# Altium PCB PCB1.PcbDoc
Units mm, origin at the board's own origin, x right, y up, seen from the top; angles counter-clockwise.
Board outline 18.46 x 50.1 mm, 2 copper layers (Component Side, Solder Side), stack 0.266 mm thick; 21 components, 22 nets, 87 pads, 33 vias.
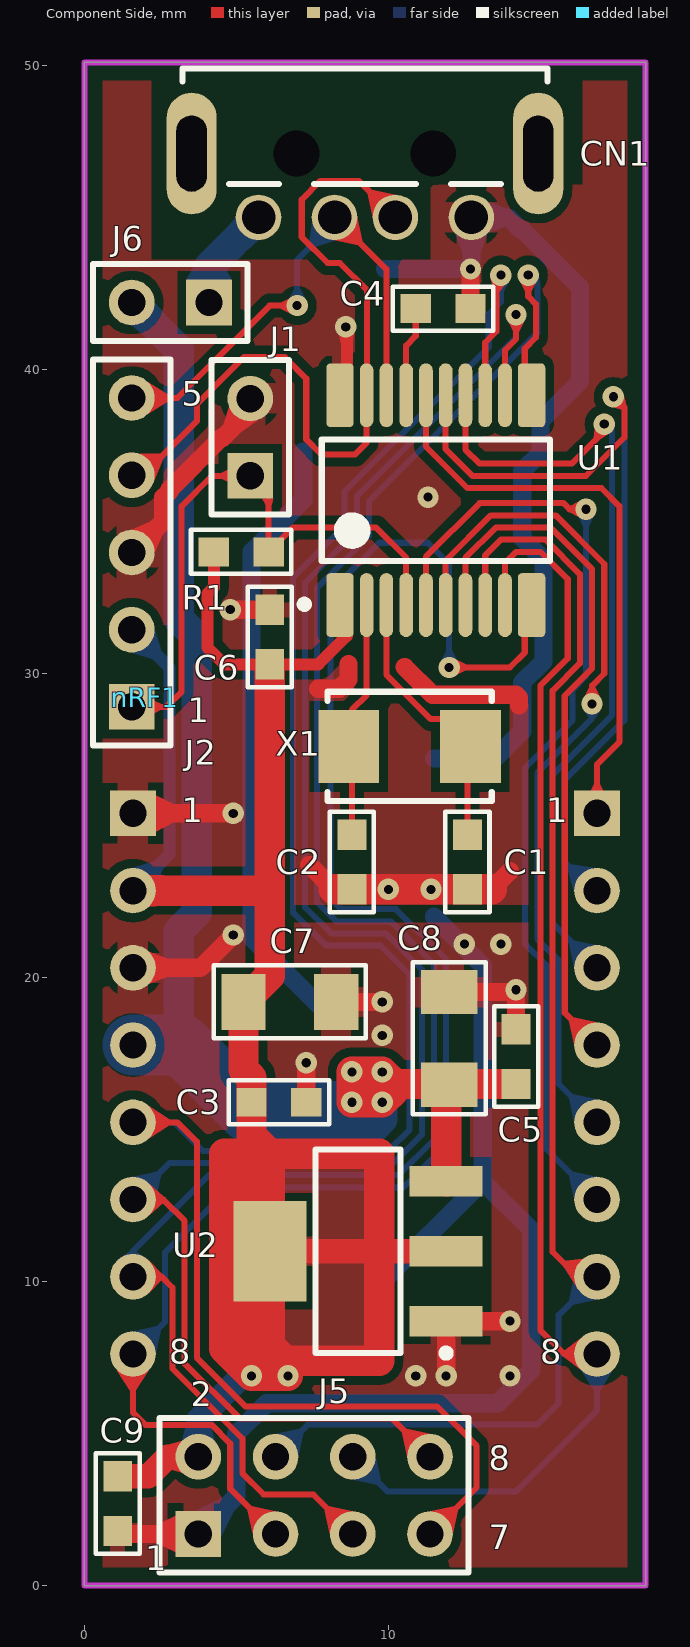
[diagram p0: Component Side view]
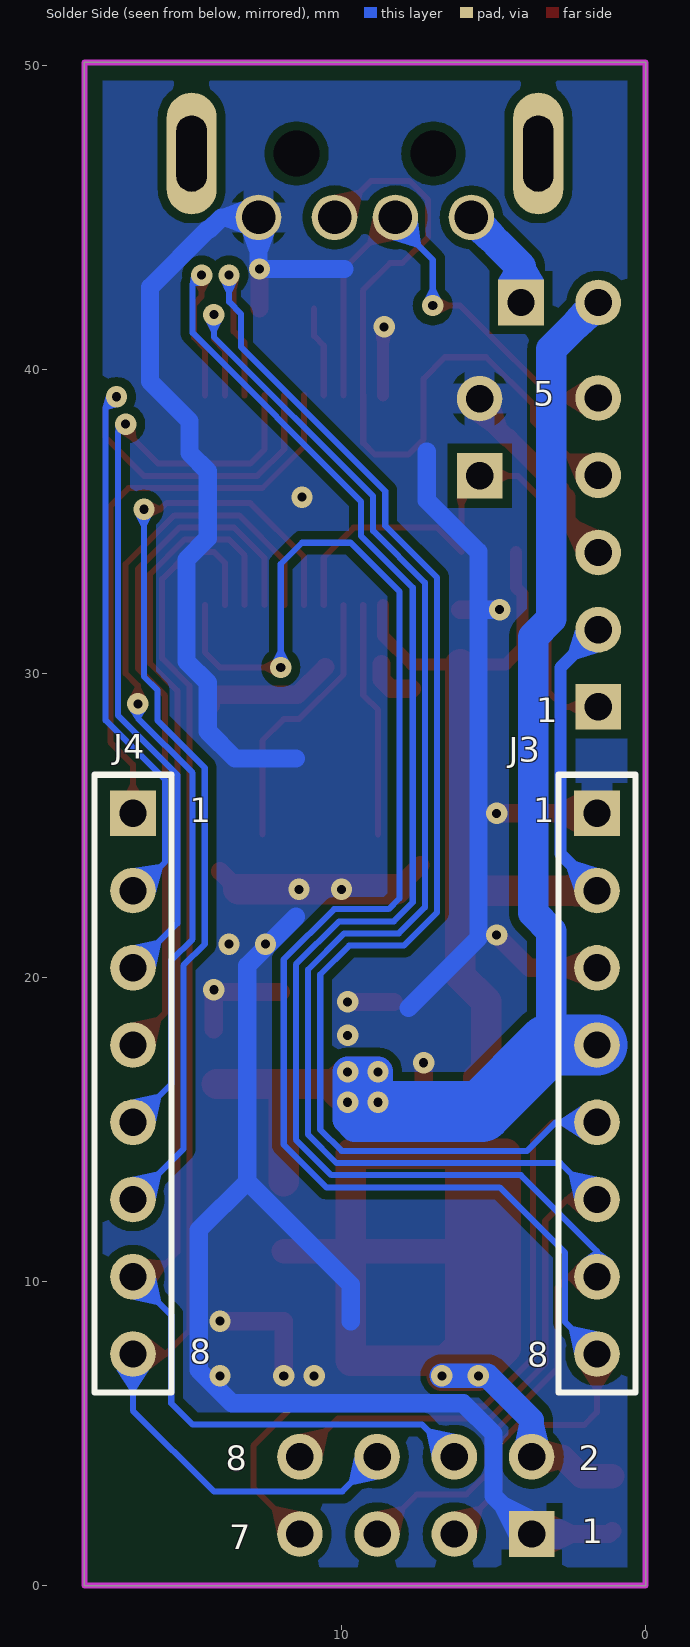
[diagram p1: Solder Side view, seen from below]

## Layer stack, top to bottom
Top Solder: solder mask 0.0102, Solder Resist, Dk 3.5
Component Side: signal copper 0.03
Dielectric 1: core 0.2, FR-4, Dk 4.58
Solder Side: signal copper 0.0356
Bottom Solder: solder mask 0.0102, Solder Resist, Dk 3.5

## Board outline
0,0 18.46,0 18.46,50.1 0,50.1

## Design rules (kind name [scope] priority, off if disabled: settings)
Clearance ClearanceKeepout [All vs OnLayer('Keep-Out Layer')] p1: gap=0.5 ignorepadtopadclearanceinfootprint=FALSE except(0: Arc-Hole Track-Hole SMDPad-Hole THPad-Hole Via-Hole Fill-Hole Poly-Hole Region-Hole Text-Hole)
Clearance ClearanceNPTH [HasPad('Free-NPTH')] p2: gap=1 ignorepadtopadclearanceinfootprint=FALSE except(0: Arc-Hole Track-Hole SMDPad-Hole THPad-Hole Via-Hole Fill-Hole Poly-Hole Region-Hole Text-Hole)
Clearance [All] p3: gap=0.2 ignorepadtopadclearanceinfootprint=FALSE except(0: Arc-Hole Track-Hole SMDPad-Hole THPad-Hole Via-Hole Fill-Hole Poly-Hole Region-Hole Text-Hole; 0.3: Arc-Poly Track-Poly SMDPad-Poly THPad-Poly Via-Poly Fill-Poly Poly-Poly)
ComponentClearance [All] p1 off: gap=0.254 collisioncheckmode=3 verticalgap=0.254 showdistances=FALSE
DiffPairsRouting [All] p1: maxlimit=0.4 minlimit=0.2 mostfreqgap=0.4 toplayer_minwidth=0.2 toplayer_maxwidth=0.3 toplayer_prefwidth=0.3 bottomlayer_minwidth=0.2 bottomlayer_maxwidth=0.3 bottomlayer_prefwidth=0.3 maxuncoupledlength=12.7
Height [All] p1 off: minheight=0 maxheight=25.4 prefheight=12.7
HoleSize [All] p1: absolutevalues=TRUE maxlimit=10 minlimit=0.3 maxpercent=80.000 minpercent=20.000
MinimumSolderMaskSliver [All] p1: minsoldermaskwidth=0.1
PlaneClearance [All] p1: clearance=0.5
PlaneClearance PlaneClearanceNPTH [HasPad('Free-NPTH')] p2: clearance=1.5
PlaneConnect PlaneConnectVia [IsVia] p1: planeconnectstyle=Direct reliefexpansion=0.508 reliefentries=4 reliefconductorwidth=0.254 reliefairgap=0.254
PlaneConnect PlaneConnectHole0_1 [HoleDiameter Between 0.1 and 0.3] p2: planeconnectstyle=Direct reliefexpansion=0.508 reliefentries=4 reliefconductorwidth=0.254 reliefairgap=0.254
PlaneConnect PlaneConnectHole0_3 [HoleDiameter Between 0.3 and 0.5] p3: planeconnectstyle=Relief reliefexpansion=0.508 reliefentries=4 reliefconductorwidth=0.4 reliefairgap=0.254
PlaneConnect PlaneConnectHole0_5 [HoleDiameter Between 0.5 and 0.8] p4: planeconnectstyle=Relief reliefexpansion=0.508 reliefentries=4 reliefconductorwidth=0.6 reliefairgap=0.254
PlaneConnect PlaneConnectHole0_8 [HoleDiameter Between 0.8 and 1.0] p5: planeconnectstyle=Relief reliefexpansion=0.508 reliefentries=4 reliefconductorwidth=0.8 reliefairgap=0.254
PlaneConnect PlaneConnectHole1_0 [HoleDiameter > 1.0] p6: planeconnectstyle=Relief reliefexpansion=0.508 reliefentries=4 reliefconductorwidth=1 reliefairgap=0.254
PlaneConnect [All] p7: planeconnectstyle=Relief reliefexpansion=0.508 reliefentries=4 reliefconductorwidth=0.254 reliefairgap=0.254
PolygonConnect PolygonConnect_BottomPad [IsPad And (PadXSize_BottomLayer * PadYSize_BottomLayer > 2)] p1: connectstyle=Relief reliefconductorwidth=1 reliefentries=4 polygonreliefangle="90 Angle" airgapwidth=0.254
PolygonConnect PolygonConnect_TopPad [IsPad And (PadXSize_TopLayer * PadYSize_TopLayer > 2)] p2: connectstyle=Relief reliefconductorwidth=1 reliefentries=4 polygonreliefangle="90 Angle" airgapwidth=0.254
PolygonConnect PolygonConnectVia [All vs IsVia] p3: connectstyle=Direct reliefconductorwidth=0.254 reliefentries=4 polygonreliefangle="90 Angle" airgapwidth=0.254
PolygonConnect PolygonConnectHole0_1 [All vs HoleDiameter Between 0.1 and 0.3] p4: connectstyle=Relief reliefconductorwidth=0.254 reliefentries=4 polygonreliefangle="90 Angle" airgapwidth=0.254
PolygonConnect PolygonConnectHole0_3 [All vs HoleDiameter Between 0.3 and 0.5] p5: connectstyle=Relief reliefconductorwidth=0.4 reliefentries=4 polygonreliefangle="90 Angle" airgapwidth=0.254
PolygonConnect PolygonConnectHole0_5 [All vs HoleDiameter Between 0.5 and 0.8] p6: connectstyle=Relief reliefconductorwidth=0.6 reliefentries=4 polygonreliefangle="90 Angle" airgapwidth=0.254
PolygonConnect PolygonConnectHole0_8 [All vs HoleDiameter Between 0.8 and 1.0] p7: connectstyle=Relief reliefconductorwidth=0.8 reliefentries=4 polygonreliefangle="90 Angle" airgapwidth=0.254
PolygonConnect PolygonConnectHole1_0 [HoleDiameter > 1.0] p8: connectstyle=Relief reliefconductorwidth=1 reliefentries=4 polygonreliefangle="90 Angle" airgapwidth=0.254
PolygonConnect PolygonConnect_Default [All] p9: connectstyle=Relief reliefconductorwidth=0.5 reliefentries=4 polygonreliefangle="90 Angle" airgapwidth=0.254
RoutingVias [All] p1: holewidth=0.3 width=0.6 viastyle="Through Hole" minholewidth=0.3 minwidth=0.7 maxholewidth=0.5 maxwidth=1
SilkToSilkClearance [All] p1: silktosilkclearance=0.05
SilkToSolderMaskClearance [IsPad] p1: minsilkscreentomaskgap=0.1 clearancetoexposedcopper=TRUE
SolderMaskExpansion SolderMaskExpansionVia [IsVia] p1: expansion=-0.18 istentingtop=FALSE
SolderMaskExpansion [All] p2: expansion=0.1 istentingtop=FALSE
Width WidthPWR [InNetClass('PWR')] p1: maxlimit=2 minlimit=0.3 preferedwidth=0.5 minimp=50.000000 maximp=50.000000 favimp=50.000000
Width Width_all [All] p2: maxlimit=2 minlimit=0.2 preferedwidth=0.2 minimp=50.000000 maximp=50.000000 favimp=50.000000
21 further rules are at their usual default settings.

## Classes and differential pairs
differential pair PIC_D: +PIC_D_P -PIC_D_N

## Components (designator, comment, footprint, x,y, rotation, side; value= is the part's Value field where it differs from the comment)
C1 "CC0603KRX7R9BB223" CHIP1608 12.6,23.8 r90 top
C2 "CC0603KRX7R9BB223" CHIP1608 8.8,23.8 r90 top
C3 "CC0603KRX7R9BB104" CHIP1608 6.4,15.9 r180 top
C4 "CC0603KRX7R8BB224" CHIP1608 11.8,42 r180 top
C5 "CC0603KRX7R9BB104" CHIP1608 14.2,17.4 r270 top
C6 "CC0603KRX7R9BB104" CHIP1608 6.1,31.2 r270 top
C7 "TAJA226K010RNJ" CHIP3216 6.76,19.2 r180 top
C8 "CC1206KKX5R8BB106" CHIP3216 12,18 r270 top
C9 "CC0603KRX7R8BB105" CHIP1608 1.1,2.7 r90 top
CN1 "1470695-3" UP2-AH-1-TH 9.23,45.8 r180 top
J1 "PHSS02G10" HDR1X2 5.46,36.5 r90 top
J2 "PHSS05G10" HDR1X5 1.56,28.9 r90 top
J3 "Header 8" HDR1X8 1.6,25.4 r90 bottom
J4 "Header 8" HDR1X8 16.86,25.4 r90 bottom
J5 "Header 4X2" HDR2X4 3.75,1.7 r0 top
J6 "PHSS02G10" HDR1X2 4.1,42.2 r180 top
nRF1 "nRF24L01[DNI]" nRF24L01 2,29.2 r270 top
R1 "RC0603JR-071KL" CHIP1608 5.16,34 r0 top
U1 "PIC18F14K50-I/SS" PIC18F14K50-SS 11.56,35.7 r90 top
U2 "LD1117AS33TR" SOT-223_N 9,11 r180 top
X1 "445C33C12M00000" 445C33C12M00000 10.7,27.6 r0 top

## Footprints (in the part's own frame and the unit in brackets; to place one, negate y for a bottom-side part, rotate by r counter-clockwise, add the part's x,y. Pads: shape width x height; smd on the part's side, far side on the other; paste and mask are expansions set on the pad)
445C33C12M00000 [mm]
  rect 2x2.4 smd mask+0.1: 1(-2,0) 2(2,0)
  silkscreen extent -2.7,-1.8 2.7,1.8, body extent -2.5,-1.6 2.5,1.6, height 4.2
CHIP1608 [mm] "Chip Resistor, 2-Leads, Body 1.60x0.80mm, IPC Low Density"
  rect 1x0.95 smd mask+0.1: 1(-0.9,0) 2(0.9,0)
  Component Side pour cut-out: -0.4,0.729 -0.4,-0.729 0.4,-0.729 0.4,0.729
  silkscreen extent -1.65,-0.72 1.65,0.72, body extent -0.8,-0.4 0.8,0.4, height 0.45
CHIP3216 [mm] "Chip Capacitor, 2-Leads, Body 3.20x1.60mm, IPC Low Density"
  rect 1.45x1.85 smd: 1(-1.525,0) 2(1.525,0)
  Component Side pour cut-out: -0.8,1.179 -0.8,-1.179 0.8,-1.179 0.8,1.179
  silkscreen extent -2.5,-1.2 2.5,1.2, body extent -1.6,-0.8 1.6,0.8, height 0.6
HDR1X2 [mm] "Connector; Header; 2 Position"
  rect 1.5x1.5 hole 0.9: 1(0,0)
  round 1.5 hole 0.9: 2(2.54,0)
  silkscreen extent -1.27,-1.27 3.81,1.27, body extent -1.29,-1.15 3.79,1.26, height 8.18
HDR1X5 [mm] "Connector; Header; 5 Position"
  rect 1.5x1.5 hole 0.9: 1(0,0)
  round 1.5 hole 0.9: 2(2.54,0) 3(5.08,0) 4(7.62,0) 5(10.16,0)
  silkscreen extent -1.27,-1.27 11.43,1.27, body extent -1.29,-1.15 11.41,1.26, height 8.18
HDR1X8 [mm] "Connector; Header; 8 Position"
  rect 1.5x1.5 hole 0.9: 1(0,0)
  round 1.5 hole 0.9: 2(-2.54,0) 3(-5.08,0) 4(-7.62,0) 5(-10.16,0) 6(-12.7,0) 7(-15.24,0) 8(-17.78,0)
  silkscreen extent -19.05,-1.27 1.27,1.27, body extent -19.07,-1.15 1.25,1.26, height 8.18
HDR2X4 [mm] "Connector; Header; 4x2 Position"
  rect 1.5x1.5 hole 0.9: 1(0,0)
  round 1.5 hole 0.9: 2(0,2.54) 3(2.54,0) 4(2.54,2.54) 5(5.08,0) 6(5.08,2.54) 7(7.62,0) 8(7.62,2.54)
  silkscreen extent -1.27,-1.27 8.89,3.81, body extent -1.25,-1.26 8.91,3.82, height 8.5
nRF24L01 [mm]
  body extent 0.03,-0.02 29.03,14.98, height 13.5
PIC18F14K50-SS [mm] "SOP, 20-Leads, Body 7.2x5.2mm, Pitch 0.65mm, IPC Medium Density"
  rrect30% 2.1x0.9 smd: 1(-3.45,3.15) 10(-3.45,-3.15) 11(3.45,-3.15) 20(3.45,3.15)
  oval 2.1x0.45 smd: 2(-3.45,2.275) 3(-3.45,1.625) 4(-3.45,0.975) 5(-3.45,0.325) 6(-3.45,-0.325) 7(-3.45,-0.975) 8(-3.45,-1.625) 9(-3.45,-2.275) 12(3.45,-2.275) 13(3.45,-1.625) 14(3.45,-0.975) 15(3.45,-0.325) 16(3.45,0.325) 17(3.45,0.975) 18(3.45,1.625) 19(3.45,2.275)
  silkscreen extent -3.55,-3.75 2,4.45, body extent -2.7,-3.75 2.7,3.75, height 2
SOT-223_N [mm] "SOT223, 4-Leads, Body 6.5x3.5mm, Pitch 2.3mm, Lead Span 7mm, IPC Medium Density"
  rect 2.4x1 smd: 1(-2.9,2.3) 2(-2.9,0) 3(-2.9,-2.3)
  rect 2.4x3.3 smd: 4(2.9,0)
  silkscreen extent -3.03,-3.35 1.4,3.47, body extent -1.85,-3.35 1.85,3.35, height 1.8
UP2-AH-1-TH [mm] "Connector; USB1.1, Type A, SM; 4 Position; Right Angle"
  round 1.5 hole 1.1: 1(3.5,0.8) 2(1,0.8) 3(-1,0.8) 4(-3.5,0.8)
  oval 1.65x4 hole 1 slot 2.5 at 90 deg: 5(-5.7,-1.3) 6(5.7,-1.3)
  round 1.2 hole 1.5 unplated: MH1(-2.25,-1.3) MH2(2.25,-1.3)
  silkscreen extent -6,-4.1 6,-0.3, body extent -6.3,-19.1 6.3,0.9, height 4.15

## Part data
C1 C2 C3 C4 C5 C6 C7 C8 C9: library part "Cap Semi", "Capacitor (Semiconductor SIM Model)"
CN1: "USB 1.1, Right Angle, SMT, A Type, Plug, 4 Position, Black"
J1 J6: library part "Header 2", "Header, 2-Pin"
J2: library part "Header 5", "Header, 5-Pin"
J3 J4: "Header, 8-Pin"
J5: "Header, 4-Pin, Dual row"
nRF1: library part nRF24L01
R1: library part Res3, "Resistor"
U1: library part PIC18F14K50, "MICROCHIPS"
U2: "1A, Low Drop Positive Voltage Regulator, 3.3V, 4-Pin SOT-223, Tape and Reel"
X1: library part ABLS-25.000MHZ-B2F-T, "MEC"

## Via types
v1: diameter 0.7, hole 0.3, Component Side to Solder Side, 33 vias

## Nets (pads, with @x,y where several pads share a name; then routed paths per layer and width w, separated by ;. In a path a pad name is that pad's centre, name@x,y a point inside that pad or via, vN(x,y) a via of type N, cw(c..) or ccw(c..) an arc to the next point about the centre after c; other vN are vias at no path point)
3_3V: C3.2 C6.2 C7.2 C9.2 J2.2 J3.2 J5.2 R1.1 U1.1 U2.2 U2.4 | length 92.6
  Component Side w0.4: R1.1 4.26,32.831 4.05,32.621 4.05,30.85 4.6,30.3 C6.2 7.695,30.3 8.635,31.24 U1.1@8.635,32.25
  Component Side w0.8: C9.2 2.1,3.6 2.74,4.24 J5.2 ; U2.4 9.7,11 U2.2
  Component Side w1: J3.2 6,22.86 ; 6.1,6.9 6.1,7.9 ; C6.2 6.1,20.065 C7.2 5.235,16.965 5.5,16.7 C3.2 5.5,14.8 6.1,14.2 ; v1(6.7,6.9) v1(5.5,6.9) 5.231,7.169 ; 5.231,7.169 4.6,7.8 4.6,14.2 5.231,14.2 ; 5.231,7.169 5.231,14.2 ; 5.231,14.2 6.1,14.2 ; 6.1,7.9 6.6,7.4 9.7,7.4 9.7,11 9.7,14.2 6.1,14.2 ; 6.1,7.9 U2.4 6.1,14.2
  Solder Side w0.4: J2.2 2.8,30.2 2.8,24.06 J3.2
  Solder Side w0.8: J5.2 3.75,5.45 5.2,6.9 v1(5.5,6.9) v1(6.7,6.9)
GND: C1.1 C2.1 C3.1 C4.1 C5.1 C6.1 C7.1 C8.1 C9.1 CN1.4 J1.2 J2.3 J3.1 J3.3 J5.1 U1.20 U2.1 | length 130
  Component Side w0.4: U1.20@8.635,39.15 v1@8.635,41.365
  Component Side w0.6: C9.1 1.2,1.7 J5.1 ; J2.3 2.6,35.02 2.6,35.792 2.81,36.002 2.81,36.057 4.503,37.75 4.55,37.75 5.46,38.66 J1.2 ; J3.3 3.82,20.32 v1(4.9,21.4) ; J3.1 v1(4.9,25.4) ; v1(4.8,32.1) C6.1 ; C3.1 v1(7.3,17.2) ; 7.4,23.7 8.2,22.9 ; 7.693,29.5 8.385,29.5 8.685,29.8 8.685,30.3 ; C7.1 v1(9.8,19.2) ; 10.535,30.214 11.449,29.3 14.2,29.3 14.3,29.2 14.3,28.95 ; v1(11.9,6.9) U2.1 v1(14,8.7) ; C8.1 v1@14.125,19.525 ; C4.1 v1(12.7,43.3) ; 13.4,22.9 14,23.5 ; C5.1 v1@14.2,19.45
  Component Side w1: 8.2,22.9 C2.1 v1(10,22.9) v1(11.4,22.9) C1.1 13.4,22.9
  Solder Side w0.6: J5.1 5,2.95 5,5 6,6 13.6,6 14.7,7.1 14.7,11.7 13.1,13.3 ; v1(4.8,32.1) 5.5,32.1 ; 7.2,37.3 7.2,35.7 5.5,34 5.5,32.1 ; 7.8,19 5.5,21.3 5.5,32.1 ; 9.7,8.7 9.7,9.9 13.1,13.3 ; 9.9,43.3 v1(12.7,43.3) ; 11.5,22 13.1,20.4 13.1,13.3 ; 11.5,27.2 13.5,27.2 14.4,28.1 14.4,29.7 15.1,30.4 15.1,33.749 14.4,34.449 14.4,36.651 15,37.251 15,38.3 16.3,39.6 16.3,42.7 14.4,44.6 14.351,44.6 13.951,45 CN1.4 ; CN1.4@12.7,45 CN1.4 ; v1@12.73,43.33 CN1.4
  other v1: 10.9,6.9 14,6.9 9.8,18.1 14.2,19.6 12.5,21.1 13.7,21.1 11.3,35.8 8.6,41.4
NetC1_2: C1.2 U1.3 X1.2 | length 8.9
  Component Side w0.2: U1.3 9.935,29.965 11.4,28.5 11.9,28.5 12.6,27.8 C1.2
NetC2_2: C2.2 U1.2 X1.1 | length 7.8
  Component Side w0.2: C2.2 8.8,28.8 9.285,29.285 U1.2
NetC4_2: C4.2 U1.17 | length 3
  Component Side w0.2: U1.17 10.585,40.785 10.9,41.1 C4.2
PIC_D_N: CN1.2 J2.5 U1.18 | length 16.7
  Component Side w0.2: J2.5 3.06,39.06 5.5,41.5 6.1,42.1 v1(7,42.1) ; CN1.2 9.935,43.295 U1.18
  Solder Side w0.2: v1(7,42.1) 7,43.6 8.23,44.83 CN1.2
PIC_D_P: CN1.3 J2.4 U1.19 | length 25.3
  Component Side w0.2: J2.4 1.92,36.52 3.7,38.3 3.7,38.851 5.249,40.4 6.6,40.4 7.3,39.7 7.3,37.7 7.8,37.2 8.9,37.2 9.285,37.585 U1.19 9.3,39.165 9.3,42.6 8.4,43.5 8,43.5 7.15,44.35 7.15,45.585 7.765,46.2 9.03,46.2 CN1.3
PIC_MCLR: J1.1 J2.1 R1.2 U1.4 | length 20.2
  Component Side w0.2: J2.1 2.7,28.9 3.2,29.4 3.2,35.5 4.2,36.5 J1.1 6.06,35.9 R1.2 6.86,34.8 9.6,34.8 10.585,33.815 U1.4
PIC_RB4: J3.5 J5.7 U1.13 | length 70.9
  Component Side w0.2: J3.5 3.06,15.24 3.7,14.6 3.7,7.5 5.3,5.9 11.6,5.9 12.9,4.6 12.9,3.23 J5.7 ; U1.13 13.185,40.885 13.55,41.25 13.55,42.95 v1(13.7,43.1)
  Solder Side w0.2: J3.5 2.96,15.24 3.9,14.3 10,14.3 10.7,15 10.7,20.1 9.75,21.05 7.953,21.05 6.859,22.144 6.859,33.156 8.562,34.859 8.562,35.994 13.3,40.731 13.3,41.819 13.7,42.219 v1(13.7,43.1)
PIC_RB5: J3.6 J5.8 U1.12 | length 61.7
  Component Side w0.2: J3.6 2.6,12.7 3.3,12 3.3,7.306 5.106,5.5 10.11,5.5 J5.8 ; U1.12 13.835,40.635 14.2,41 v1(14.2,41.8)
  Solder Side w0.2: J3.6 2.8,13.9 10.166,13.9 11.1,14.834 11.1,20.266 9.916,21.45 8.119,21.45 7.259,22.31 7.259,32.99 8.962,34.694 8.962,35.828 14.2,41.066 v1(14.2,41.8)
PIC_RB6: J3.7 J5.5 U1.11 | length 63.6
  Component Side w0.2: J3.7 2.54,10.16 2.9,9.8 2.9,7.141 5.2,4.841 5.2,3.7 5.9,3 7.53,3 J5.5 ; U1.11@14.485,39.15 14.485,40.685 14.85,41.05 14.85,42.15 14.6,42.4 v1(14.6,43.1)
  Solder Side w0.2: J3.7 1.6,11 4.1,13.5 10.331,13.5 11.5,14.669 11.5,20.431 10.081,21.85 8.284,21.85 7.659,22.476 7.659,32.824 9.362,34.528 9.362,35.662 14.9,41.2 14.9,42.8 v1(14.6,43.1)
PIC_RB7: J3.8 J5.3 U1.10 | length 57
  Component Side w0.2: J3.8 1.6,5.7 2.01,5.29 4.185,5.29 4.8,4.675 4.8,3.19 J5.3 ; v1(12,30.2) 14,30.2 14.485,30.685 U1.10@14.485,32.25
  Solder Side w0.2: J3.8 2.65,8.67 2.65,10.95 4.8,13.1 10.497,13.1 11.9,14.503 11.9,20.597 10.247,22.25 8.45,22.25 8.1,22.6 8.1,32.7 9.7,34.3 11.3,34.3 12,33.6 v1(12,30.2)
PIC_RC0: J4.1 U1.16 | length 19.3
  Component Side w0.2: U1.16 11.235,37.465 12.6,36.1 17,36.1 17.6,35.5 17.6,27.74 16.86,27 J4.1
PIC_RC1: J4.2 U1.15 | length 27.7
  Component Side w0.2: U1.15 11.885,37.381 12.766,36.5 16.5,36.5 17.76,37.76 17.76,38.74 v1(17.4,39.1)
  Solder Side w0.2: J4.2 16.74,22.86 15.8,23.8 15.8,26.5 17.76,28.46 17.76,38.74 v1(17.4,39.1)
PIC_RC2: J4.3 U1.14 | length 26.6
  Component Side w0.2: U1.14 12.535,37.365 13,36.9 16.031,36.9 17.1,37.969 v1(17.1,38.2)
  Solder Side w0.2: J4.3 15.4,21.78 15.4,26.666 17.35,28.616 17.35,37.95 v1(17.1,38.2)
PIC_RC3: J4.4 U1.7 | length 23.2
  Component Side w0.2: U1.7 12.535,33.801 13.534,34.8 15.334,34.8 16.7,33.434 16.7,30.166 15.8,29.266 15.8,18.84 J4.4
PIC_RC4: J4.5 U1.6 | length 28
  Component Side w0.2: U1.6 11.885,33.716 13.369,35.2 15.5,35.2 17.1,33.6 17.1,30 16.7,29.6 v1(16.7,29)
  Solder Side w0.2: v1(16.7,29) 16.7,28.531 14.9,26.731 14.9,21.266 15.6,20.566 15.6,16.5 J4.5
PIC_RC5: J4.6 U1.5 | length 32.2
  Component Side w0.2: U1.5 11.235,33.835 13,35.6 15.763,35.6 15.963,35.4 v1(16.5,35.4)
  Solder Side w0.2: v1(16.5,35.4) 16.5,29.9 16.05,29.45 16.05,28.447 14.5,26.897 14.5,21.1 15.2,20.4 15.2,14.36 J4.6
PIC_RC6: J4.7 J5.4 U1.8 | length 44.6
  Component Side w0.2: U1.8 13.185,33.885 13.7,34.4 15.169,34.4 16.3,33.269 16.3,30.331 15.4,29.431 15.4,10.975 16.215,10.16 J4.7
  Solder Side w0.2: J5.4 7.35,5.3 14.9,5.3 15.6,6 15.6,8.9 J4.7
PIC_RC7: J4.8 J5.6 U1.9 | length 42.9
  Component Side w0.2: U1.9 13.835,33.635 14.2,34 15.003,34 15.9,33.103 15.9,30.497 15,29.597 15,8.4 15.78,7.62 J4.8
  Solder Side w0.2: J5.6@9.04,4.24 J5.6 9.97,3.1 14.2,3.1 16.86,5.76 J4.8
VBUS: CN1.1 J6.1 | length 3.5
  Solder Side w1: J6.1 4.1,43.37 CN1.1
VIN: C5.2 C8.2 J3.4 J6.2 U2.3 | length 52.3
  Component Side w1: 10.2,16.3 v1(9.8,15.9) v1(8.8,15.9) v1(8.8,16.9) v1(9.8,16.9) ; U2.3 C8.2@11.9,16.4 ; C5.2@14.1,16.5 10.2,16.5 ; v1(9.8,16.9) 9.8,16.5 10.2,16.5 ; v1(9.8,16.9) 10.2,16.5
  Solder Side w1: J6.2 3.1,40.66 3.1,31.8 3.7,31.2 3.7,22.127 3.1,21.527 3.1,18 ; 7.9,15.6 8.4,15.1 9.56,15.1 9.8,15.34 v1(9.8,15.9) v1@9.8,16 ; v1(8.8,15.9) v1(8.8,16.9) v1(9.8,16.9) v1@9.8,16 ; 9.2,15.6 9.4,15.6 v1@9.8,16
  Solder Side w2: J3.4 3.22,17.78 5.4,15.6 7.9,15.6 9.2,15.6
pads on no net: CN1.5 CN1.6 CN1.MH1 CN1.MH2

## Polygon pours and split planes (outlines as drawn)
3_3V on Component Side "Bottom Layer-No Net" (solid, pour order 6): 9.7,14.2 9.7,7.4 5.231,7.4 5.231,14.2
GND on Component Side "Bottom Layer-No Net" (solid, remove dead copper, pour order 2): 0,50.1 0,0 18.46,0 18.46,50.1
GND on Component Side "GND_L01_P000" (solid, remove dead copper, pour order 0): 8.685,30.3 8.685,29.8 8.385,29.5 7.693,29.5 7.4,29.207 7.4,23.7 8.2,22.9 13.4,22.9 14,23.5 14,29.207 12.793,29.207 12.7,29.3 12.2,29.8 10.949,29.8 10.449,30.3
GND on Solder Side "Bottom Layer-No Net" (solid, remove dead copper, pour order 4): 0,50.1 0,0 18.46,0 18.46,50.1

## Keep-outs
Keep-Out Layer:
  the board outline again, w0.2

## Other copper
Component Side:
  pour cut-out: 13.4,8.7 13.4,14.1 10.5,14.1 10.5,8.7
  pour cut-out: 2.2,50.1 2.2,43.6 11.4,43.6 11.4,46.071 16.377,46.077 16.4,46.1 16.4,50.1
  pour cut-out: 6.7,22.4 14.4,22.4 14.4,21.8 6.7,21.8
  pour cut-out: 10.1,33.3 15.9,33.3 15.9,28.997 10.1,28.997

## Silkscreen, mask and mechanical layers (free items; w line width, h text height)
Top Overlay:
  text "1" at 3.2,25.1 h0.8
  text "1" at 15.2,25.1 h0.8
  text "8" at 2.8,7.3 h0.8
  text "8" at 15,7.3 h0.8
Bottom Overlay:
  text "5" at 3.7,38.8 h0.8
  text "1" at 3.6,28.4 h0.8
  text "2" at 2.2,3.8 h0.8
  text "8" at 13.8,3.8 h0.8
  text "1" at 2.1,1.4 h0.8
  text "7" at 13.7,1.2 h0.8
Drill Drawing:
  circle w0.254: c-0.139,79.63 r0.847
  lines w0.254: -0.986,67.776 -0.563,67.776 -0.563,67.353 0.284,67.353 0.284,67.776 0.707,67.776 0.707,68.623 0.284,68.623 0.284,69.046 -0.563,69.046 -0.563,68.623 -0.986,68.623 -0.986,67.776 ; -0.986,72.01 -0.139,71.163 0.707,72.01 -0.139,72.856 -0.986,72.01 ; -0.986,76.666 0.707,76.666 -0.139,74.973 -0.986,76.666 ; -0.986,82.593 0.707,82.593 0.707,84.286 -0.986,84.286 -0.986,82.593
  lines w0.381: -2.505,66.21 347.459,66.21 ; -2.505,85.26 347.459,85.26 ; 11.488,62.4 11.488,89.07 ; 25.2,62.4 25.2,89.07 ; 53.132,62.4 53.132,89.07 ; 65.981,62.4 65.981,89.07 ; 84.62,62.4 84.62,89.07 ; 128.548,62.4 128.548,89.07 ; 143.531,62.4 143.531,89.07 ; 162.474,62.4 162.474,89.07 ; 194.468,62.4 194.468,89.07 ; 216.154,62.4 216.154,89.07 ; 250.028,62.4 250.028,89.07 ; 283.901,62.4 283.901,89.07 ; 311.833,62.4 311.833,89.07 ; -2.505,62.4 347.459,62.4 347.459,89.07 -2.505,89.07 -2.505,62.4
  text "Symbol" at -0.219,86.403 h1.83
  text "Count" at 12.631,86.403 h1.83
  text "Hole Size" at 26.343,86.403 h1.83
  text "Plated" at 54.275,86.403 h1.83
  text "Hole Type" at 67.124,86.403 h1.83
  text "Drill Layer Pair" at 85.763,86.403 h1.83
  text "Via/Pad" at 129.691,86.403 h1.83
  text "Pad Shape" at 144.674,86.403 h1.83
  text "Template" at 163.617,86.403 h1.83
  text "Description" at 195.611,86.403 h1.83
  text "Hole Tolerance (+)" at 217.297,86.403 h1.83
  text "Hole Tolerance (-)" at 251.171,86.403 h1.83
  text "Hole Length" at 285.044,86.403 h1.83
  text "Routed Path Length" at 312.976,86.403 h1.83
  text "2" at 12.631,82.593 h1.52
  text "1.000mm (39.37mil)" at 26.343,82.593 h1.52
  text "PTH" at 54.275,82.593 h1.52
  text "Slot" at 67.124,82.593 h1.52
  text "Component Side - Solder Side" at 85.763,82.593 h1.52
  text "Pad" at 129.691,82.593 h1.52
  text "Rounded" at 144.674,82.593 h1.52
  text "r165_400h100_250r100" at 163.617,82.593 h1.52
  text "2.500mm (98.43mil)" at 285.044,82.593 h1.52
  text "1.500mm (59.06mil)" at 312.976,82.593 h1.52
  text "2" at 12.631,78.783 h1.52
  text "1.500mm (59.06mil)" at 26.343,78.783 h1.52
  text "NPTH" at 54.275,78.783 h1.52
  text "Round" at 67.124,78.783 h1.52
  text "Component Side - Solder Side" at 85.763,78.783 h1.52
  text "Pad" at 129.691,78.783 h1.52
  text "Rounded" at 144.674,78.783 h1.52
  text "c120hn150" at 163.617,78.783 h1.52
  text "-" at 285.044,78.783 h1.52
  text "-" at 312.976,78.783 h1.52
  text "4" at 12.631,74.973 h1.52
  text "1.100mm (43.31mil)" at 26.343,74.973 h1.52
  text "PTH" at 54.275,74.973 h1.52
  text "Round" at 67.124,74.973 h1.52
  text "Component Side - Solder Side" at 85.763,74.973 h1.52
  text "Pad" at 129.691,74.973 h1.52
  text "Rounded" at 144.674,74.973 h1.52
  text "c150h110" at 163.617,74.973 h1.52
  text "-" at 285.044,74.973 h1.52
  text "-" at 312.976,74.973 h1.52
  text "33" at 12.631,71.163 h1.52
  text "0.300mm (11.81mil)" at 26.343,71.163 h1.52
  text "PTH" at 54.275,71.163 h1.52
  text "Round" at 67.124,71.163 h1.52
  text "Component Side - Solder Side" at 85.763,71.163 h1.52
  text "Via" at 129.691,71.163 h1.52
  text "Rounded" at 144.674,71.163 h1.52
  text "v70h30" at 163.617,71.163 h1.52
  text "-" at 285.044,71.163 h1.52
  text "-" at 312.976,71.163 h1.52
  text "33" at 12.631,67.353 h1.52
  text "0.900mm (35.43mil)" at 26.343,67.353 h1.52
  text "PTH" at 54.275,67.353 h1.52
  text "Round" at 67.124,67.353 h1.52
  text "Component Side - Solder Side" at 85.763,67.353 h1.52
  text "Pad" at 129.691,67.353 h1.52
  text "(Mixed)" at 144.674,67.353 h1.52
  text "(Mixed)" at 163.617,67.353 h1.52
  text "-" at 285.044,67.353 h1.52
  text "-" at 312.976,67.353 h1.52
  text "74 Total" at 12.631,63.543 h1.52
  text "Slot definitions :" at -0.219,59.861 h1.52
  text "Routed Path Length" at 26.012,59.861 h1.52
  text "= Calculated from tool start centre position to tool end centre position." at 54.019,59.861 h1.52
  text "Hole Length" at 26.012,57.321 h1.52
  text "= Routed Path Length + Tool Size = Slot length as defined in the PCB layout" at 43.609,57.321 h1.52

## Text inside footprints (layer, text, board x,y; h text height)
CN1: Mechanical 1 "PCB Edge" at 14.403,50.273 h0.25 r180
J2: Top Overlay "1" at 3.4,28.4 h0.8; Top Overlay "5" at 3.2,38.8 h0.8
J3: Bottom Overlay "8" at 3.9,7.2 h0.8; Bottom Overlay "1" at 3.7,25.1 h0.8
J4: Bottom Overlay "8" at 15,7.3 h0.8; Bottom Overlay "1" at 15,25.1 h0.8
J5: Top Overlay "8" at 13.3,3.8 h0.8; Top Overlay "7" at 13.3,1.2 h0.8; Top Overlay "1" at 2,0.5 h0.8; Top Overlay "2" at 3.5,5.9 h0.8